# Altium PCB uMultimeter_ExpProbeB_Pcb.PcbDoc
Units mil, origin at the board's own origin, x right, y up, seen from the top; angles counter-clockwise.
Board outline 875 x 1000 mil, 2 copper layers (Top Layer, Bottom Layer); 8 components, 14 nets, 34 pads, 2 vias.
Unrouted connection lines stored in the file: 1.
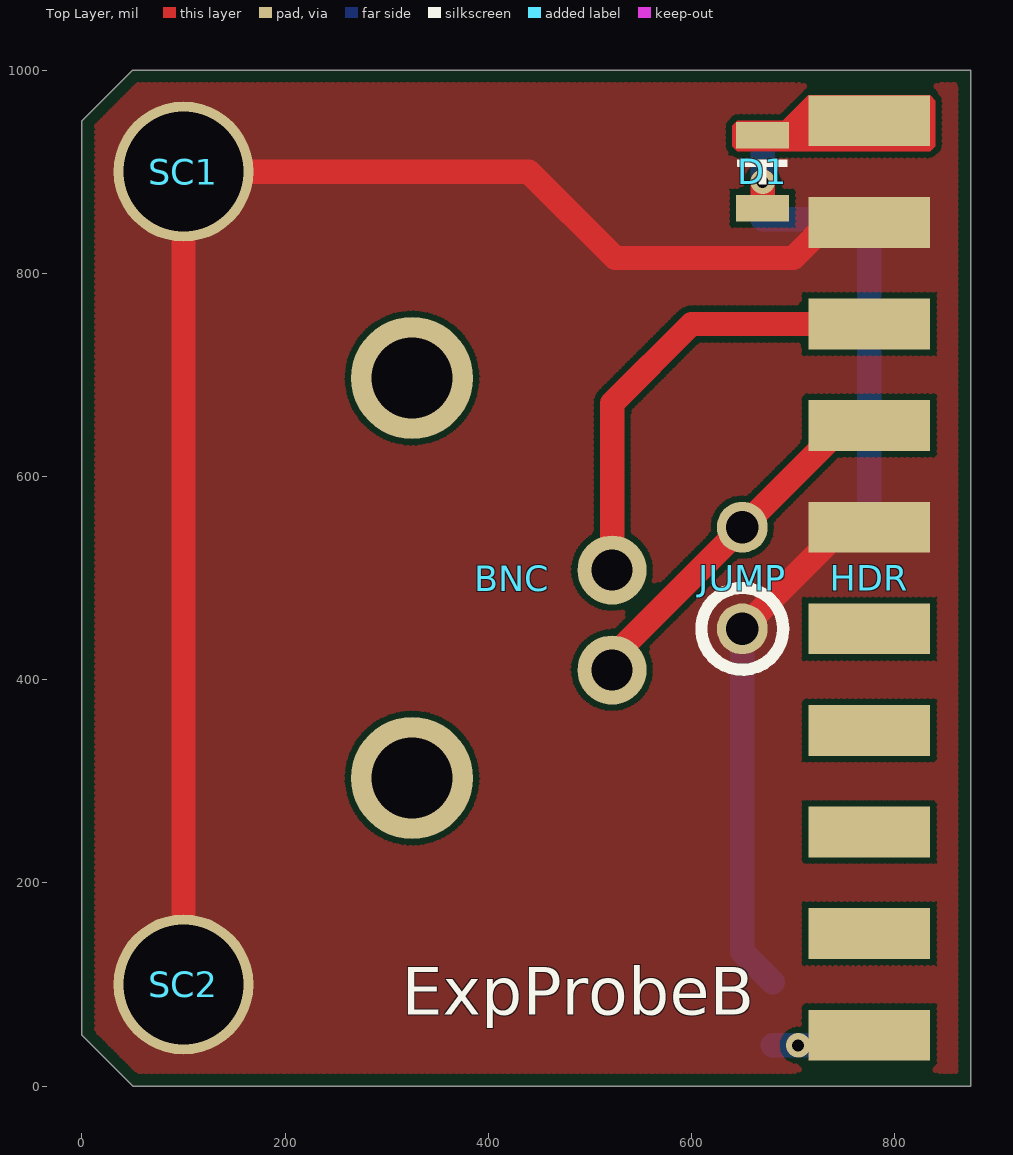
[diagram p0: Top Layer view]
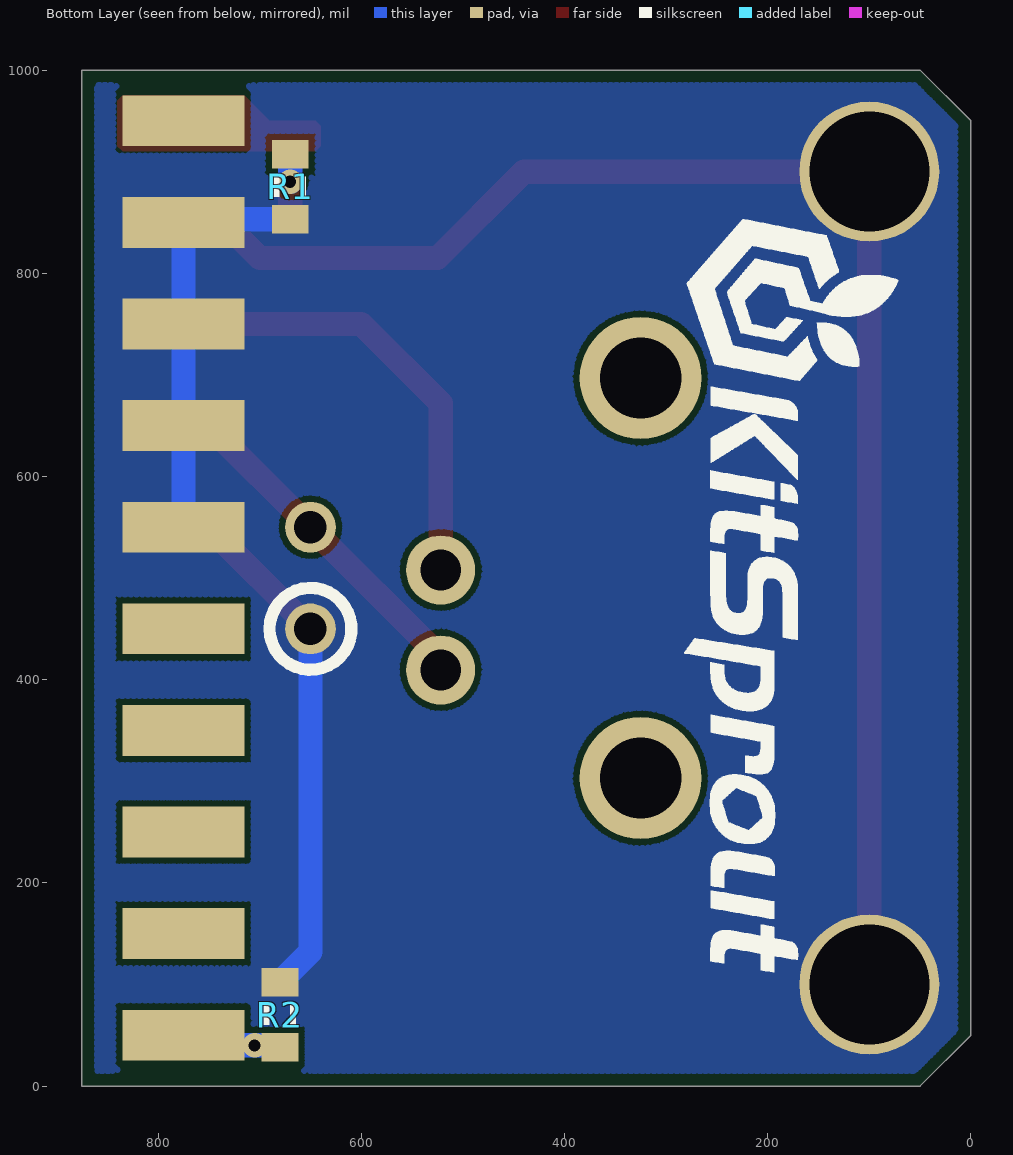
[diagram p1: Bottom Layer view, seen from below]

## Layer stack, top to bottom
Top Solder: solder mask 0.4, Solder Resist, Dk 3.5
Top Layer: signal copper 1.4
Dielectric1: dielectric 12.6, FR-4, Dk 4.8
Bottom Layer: signal copper 1.4
Bottom Solder: solder mask 0.4, Solder Resist, Dk 3.5

## Board outline
0,50 50,0 875,0 875,1000 50,1000 0,950

## Design rules (kind name [scope] priority, off if disabled: settings)
Clearance ClearancePolygon [InPolygon] p1: gap=6
Clearance [All] p2: gap=6
ComponentClearance [All] p1: gap=0 collisioncheckmode=3 verticalgap=0 showdistances=FALSE
Height [All] p1: minheight=0 maxheight=5000 prefheight=500
HoleSize [All] p1: absolutevalues=TRUE maxlimit=200 minlimit=1 maxpercent=80.000 minpercent=20.000
HoleToHoleClearance [All] p1: gap=6 allowstackedmicrovias=TRUE
MinimumSolderMaskSliver [All] p1: minsoldermaskwidth=4
PlaneConnect [All] p1: planeconnectstyle=Direct reliefexpansion=20 reliefentries=4 reliefconductorwidth=20 reliefairgap=10
PolygonConnect [All] p1: connectstyle=Direct reliefconductorwidth=20 reliefentries=4 polygonreliefangle="90 Angle" airgapwidth=10
RoutingVias [All] p1: holewidth=12 width=20 viastyle="Through Hole" minholewidth=12 minwidth=20 maxholewidth=100 maxwidth=200
SilkToSilkClearance [All] p1: silktosilkclearance=0
SilkToSolderMaskClearance SilkscreenOverComponentPads [IsPad] p1: minsilkscreentomaskgap=1 clearancetoexposedcopper=TRUE
SolderMaskExpansion [All] p1: expansion=2
Width [All] p1: maxlimit=64 minlimit=6 preferedwidth=10
22 further rules are at their usual default settings.

## Classes and differential pairs
component class uMultimeter_ExpProbeB_Sch: BNC D1 JUMP R1 R2 SC1 SC2
component class EXP: HDR

## Components (designator, comment, footprint, x,y, rotation, side; value= is the part's Value field where it differs from the comment)
BNC "BNC" BNC_4P 325,500 r0 top
D1 "LED_0805" LED_0805_BLUE 670,900 r270 top
HDR "HDR2x10_2.54" HDR2X10_2.54_180H 775,950 r0 top
JUMP "HDR1x2_2.54" HDR1X2_2.54_180 650,550 r0 top
R1 "Res_0603" RES_0603 670,885 r270 bottom
R2 "Res_0603" RES_0603 680,70 r270 bottom
SC1 "M3" SCRREW_M3 100,900 r0 top
SC2 "M3" SCRREW_M3 100,100 r0 top

## Footprints (in the part's own frame and the unit in brackets; to place one, negate y for a bottom-side part, rotate by r counter-clockwise, add the part's x,y. Pads: shape width x height; smd on the part's side, far side on the other; paste and mask are expansions set on the pad)
BNC_4P [mil]
  round 120 hole 80: 0(0,-196.85) 0(0,196.85)
  round 68 hole 40: 1(196.85,7.87) 2(196.85,-90.55)
  body extent -1125,-290 250,290, height 519
HDR1X2_2.54_180 [mil]
  round 50 hole 32: 1(0,0) 2(0,-100)
  body extent -49,-150 49,50, height 323
HDR2X10_2.54_180H [mil]
  rect 120x50 smd: 1(0,0) 3(0,-100) 5(0,-200) 7(0,-300) 9(0,-400) 11(0,-500) 13(0,-600) 15(0,-700) 17(0,-800) 19(0,-900)
  rect 120x50 smd far side: 2(0,0) 4(0,-100) 6(0,-200) 8(0,-300) 10(0,-400) 12(0,-500) 14(0,-600) 16(0,-700) 18(0,-800) 20(0,-900)
  body extent -38,-950 415,50, height 100
LED_0805_BLUE [mil]
  rect 26x52 smd: 1(-36,0) 2(36,0)
  silkscreen extent -12,-25 12,24, body extent -40,-25 40,25, height 43
RES_0603 [mil]
  rect 28x36 smd: 1(-32,0) 2(32,0)
  silkscreen extent -10,-16 10,16, body extent -31,-16 32,16, height 20
SCRREW_M3 [mm]
  round 3.5 hole 3 mask+0: 0(0,0)

## Part data
D1: "LED"
HDR: "Header"
JUMP: library part HDR1x2_2.54T, "Header"
R1 R2: "Resistor"
SC1 SC2: library part Screw_M3, "Screw"

## Via types
v1: diameter 24, hole 12, Top Layer to Bottom Layer, 2 vias

## Nets (pads, with @x,y where several pads share a name; then routed paths per layer and width w, separated by ;. In a path a pad name is that pad's centre, name@x,y a point inside that pad or via, vN(x,y) a via of type N, cw(c..) or ccw(c..) an arc to the next point about the centre after c; other vN are vias at no path point)
3V3: D1.1 HDR.1 HDR.2
EXP_ID1: HDR.19 HDR.20 R2.2 | length 85
  Bottom Layer w24: R2.2@680,40 v1(705,40) HDR.20@765,40
GND: HDR.3 HDR.4 HDR.6 HDR.8 HDR.9 HDR.10 JUMP.2 R1.2 R2.1 SC1.0 SC2.0 | length 2456.6
  Top Layer w24: SC2.0 SC1.0 440,900 525,815 700,815 735,850 HDR.3 ; JUMP.2 750,550 HDR.9
  Bottom Layer w24: JUMP.2 650,132 R2.1 ; R1.2 HDR.4@775,853 ; HDR.10 HDR.8 HDR.6 HDR.4
NetD1_2: D1.2 R1.1 | length 53
  Top Layer w24: D1.2 v1(670,890)
  Bottom Layer w24: v1(670,890) R1.1
NetHDR_11: HDR.11
NetHDR_12: HDR.12
NetHDR_13: HDR.13
NetHDR_14: HDR.14
NetHDR_15: HDR.15
NetHDR_16: HDR.16
NetHDR_17: HDR.17
NetHDR_18: HDR.18
PROBE_CH1: BNC.1 HDR.5 | length 449.5
  Top Layer w24: BNC.1 521.85,671.85 600,750 HDR.5
PROBE_CH2: BNC.2 HDR.7 JUMP.1 | length 360.1
  Top Layer w24: BNC.2 521.85,421.85 JUMP.1 750,650 HDR.7
pads on no net: BNC.0

## Polygon pours and split planes (outlines as drawn)
GND on Top Layer "Bottom Layer-No Net" (hatched 45Degree grid 4 track 6, remove dead copper, pour order 2): 860,985 55,985 15,945 15,55 55,15 860,15
GND on Bottom Layer "Bottom Layer-No Net" (hatched 45Degree grid 4 track 6, remove dead copper, pour order 4): 860,985 55,985 15,945 15,55 55,15 860,15

## Other copper
Top Layer:
  region net 3V3: 840,970 835,975 715,975 690,950 645,950 640,945 640,925 645,920 835,920 840,925

## Silkscreen, mask and mechanical layers (free items; w line width, h text height)
Top Overlay:
  circle w12: c650,450 r40.31
  text "ExpProbeB" at 315,55 h80
Bottom Overlay:
  drawing of 3511 lines, arcs and shapes, not listed
Mechanical 1:
  the board outline again, w2
Drill Drawing:
  text ".Legend" at 975,35 h60